# Altium PCB PCB1.PcbDoc
Units mil, origin at the board's own origin, x right, y up, seen from the top; angles counter-clockwise.
Board outline 4500 x 2600 mil, 2 copper layers (Top Layer, Bottom Layer), stack 60.4 mil thick; 8 components, 17 nets, 77 pads, 3 vias.
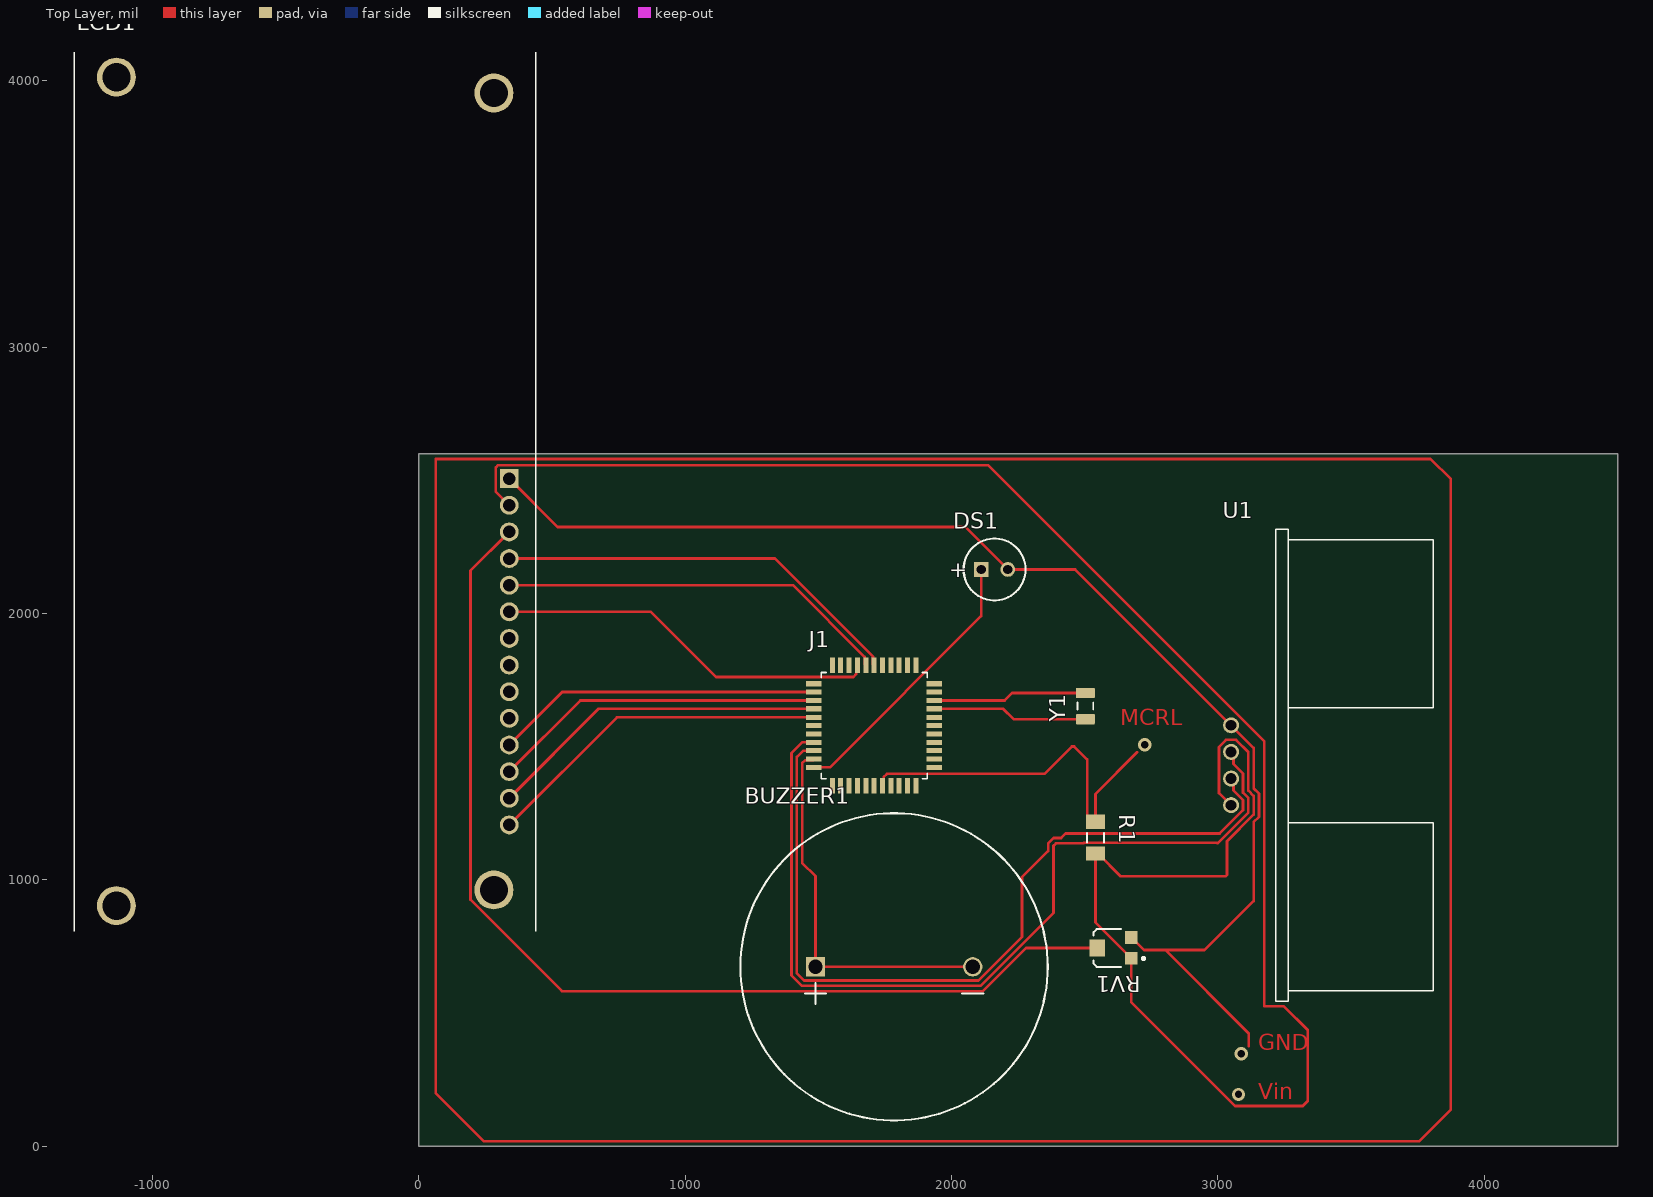
[diagram p0: Top Layer view]
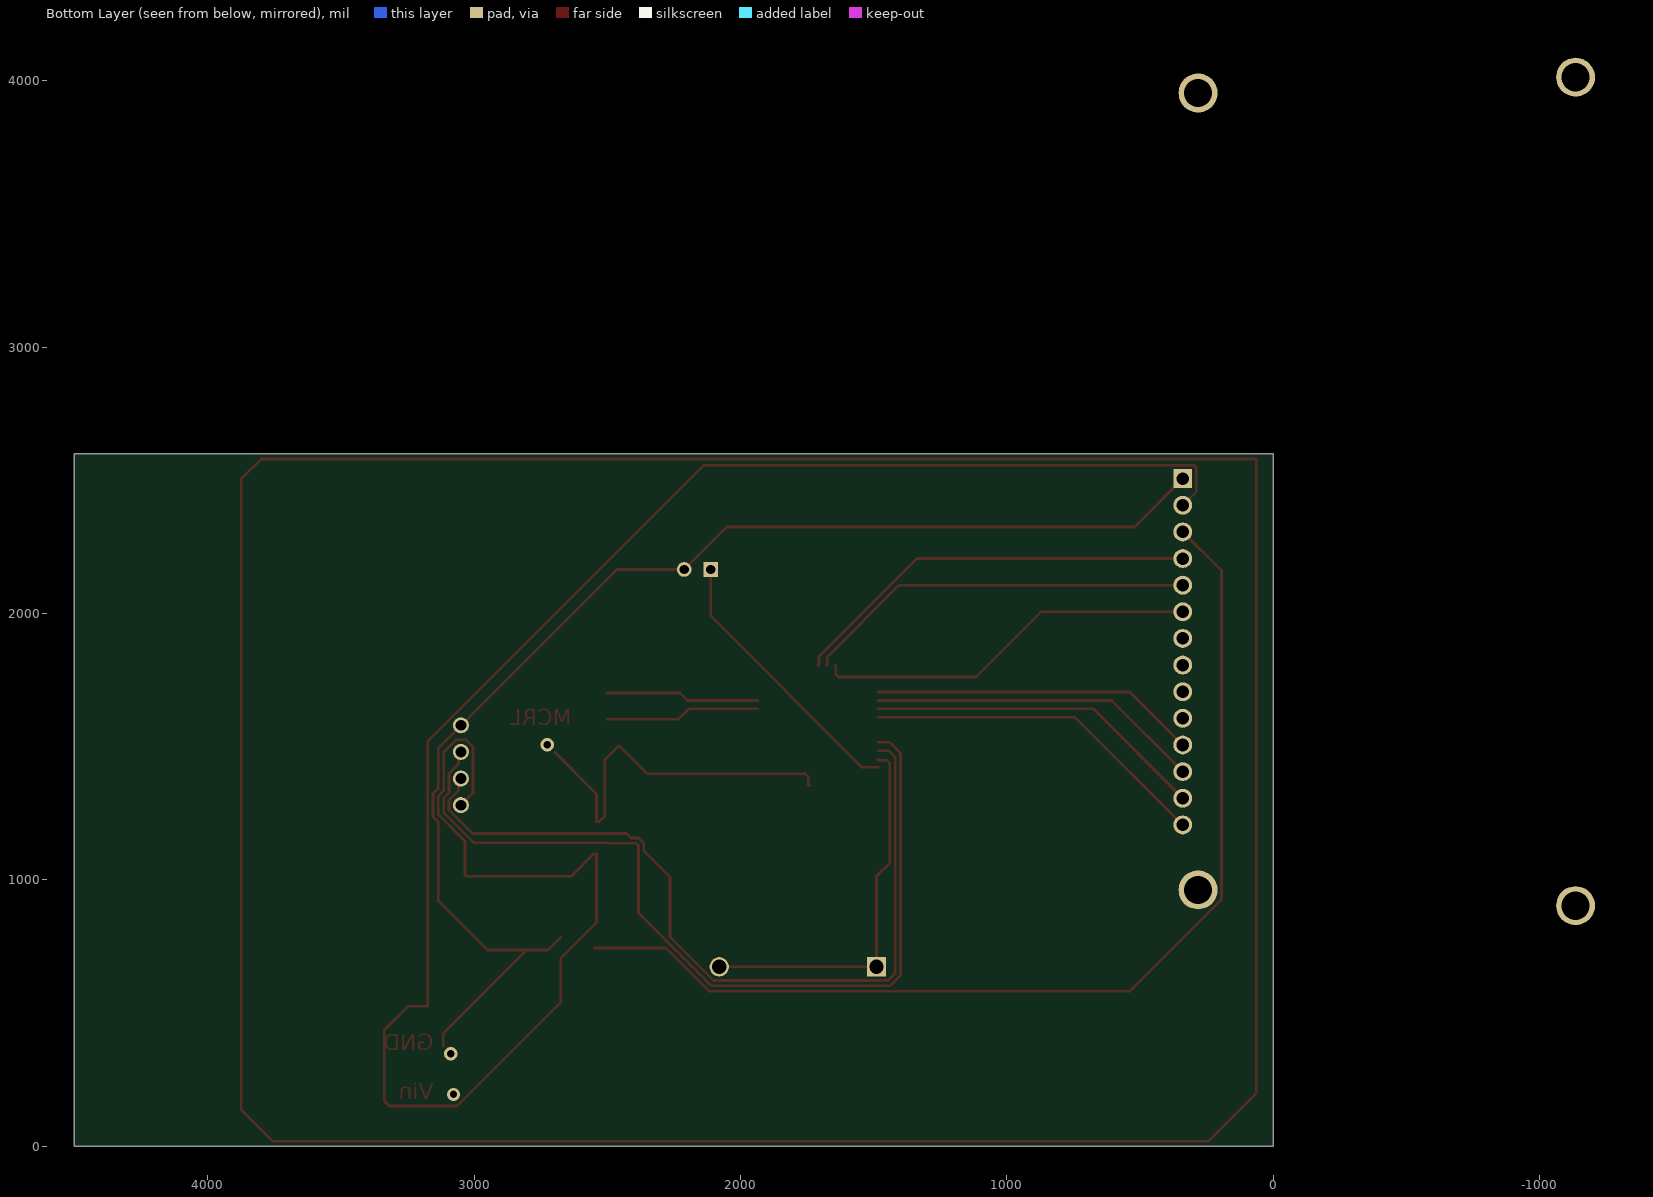
[diagram p1: Bottom Layer view, seen from below]

## Layer stack, top to bottom
Top Solder: solder mask 0.5, Solder Resist, Dk 3.3
Top Layer: signal copper 0.7
Dielectric1: core 59, FR-4, Dk 4.3
Bottom Layer: signal copper 0.7
Bottom Solder: solder mask 0.5, Solder Resist, Dk 3.3

## Board outline
0,0 4500,0 4500,2600 0,2600

## Design rules (kind name [scope] priority, off if disabled: settings)
Clearance [All] p1: gap=10 ignorepadtopadclearanceinfootprint=FALSE
DiffPairsRouting [All] p1: maxlimit=10 minlimit=10 mostfreqgap=10 toplayer_minwidth=10 toplayer_maxwidth=10 toplayer_prefwidth=10 bottomlayer_minwidth=10 bottomlayer_maxwidth=10 bottomlayer_prefwidth=10 maxuncoupledlength=500
HoleSize [All] p1: absolutevalues=TRUE maxlimit=300 minlimit=10 maxpercent=80.000 minpercent=20.000
MinimumAnnularRing [All] p1: minimumring=10
PasteMaskExpansion [All] p1: expansion=10
PlaneClearance [All] p1: clearance=15
PlaneConnect [All] p1: pad.planeconnectstyle=Relief pad.reliefexpansion=20 pad.reliefentries=4 pad.reliefconductorwidth=10 pad.reliefairgap=10 via.planeconnectstyle=Direct via.reliefexpansion=20 via.reliefentries=4 via.reliefconductorwidth=10 via.reliefairgap=10
PolygonConnect [All] p1: thpad.connectstyle=Relief thpad.reliefconductorwidth=10 thpad.reliefentries=4 thpad.polygonreliefangle="90 Angle" thpad.airgapwidth=10 smdpad.connectstyle=Relief smdpad.reliefconductorwidth=10 smdpad.reliefentries=4 smdpad.polygonreliefangle="90 Angle" smdpad.airgapwidth=10 via.connectstyle=Direct via.reliefconductorwidth=10 via.reliefentries=4 via.polygonreliefangle="90 Angle" via.airgapwidth=10
RoomDefinition Sheet1 [InComponentClass('Sheet1')] p1: confinementstyle=ConfineIn formatcopy=TRUE lockcomponents=FALSE outline -7464,-4427 -5464,-4427 -5464,-3427 -7464,-3427
RoutingVias [All] p1: holewidth=10 width=20 viastyle="Through Hole" minholewidth=10 minwidth=20 maxholewidth=10 maxwidth=20
SMDNeckDown [All] p1: percent=100.000
SilkToSolderMaskClearance SilkscreenOverComponentPads [IsPad] p1: minsilkscreentomaskgap=10 clearancetoexposedcopper=TRUE
SolderMaskExpansion [All] p1: expansion=10 istentingtop=FALSE
SupplyNets "Schematic Supply Nets" [InNet('GND')] p1: voltage=0.000
Width [All] p1: maxlimit=10 minlimit=10 preferedwidth=10
24 further rules are at their usual default settings.

## Components (designator, comment, footprint, x,y, rotation, side; value= is the part's Value field where it differs from the comment)
BUZZER1 "ADA1898" ADAI-ADA1898 1784,673.13 r0 top
DS1 "WP7113SGC" KING-WP7113SGC_V 2161,2165 r0 top
J1 "PIC16F877A-E/PT" QFP80P1200X1200X120-44N 1709,1579 r0 top
LCD1 "LM016L" LCD_LM016L 339,2506 r90 top
R1 "Resistor 10k +/-1% 1206 250 mW" RESC3216X60X45ML15T20 2540,1158.04 r270 top value=10k
RV1 "TC33X-2-103E" BOUR-TC33X-2_V 2604,744 r180 top
U1 "HC-SR04" XCVR_HC-SR04 3049,1430 r90 top
Y1 "ABS07-166-32.768KHZ-T" EPSON-FC-135_V 2502.06,1652 r90 top

## Footprints (in the part's own frame and the unit in brackets; to place one, negate y for a bottom-side part, rotate by r counter-clockwise, add the part's x,y. Pads: shape width x height; smd on the part's side, far side on the other; paste and mask are expansions set on the pad)
ADAI-ADA1898 [mm] "THD, 2-Leads, Dia 29.3mm, Pitch 15mm"
  rect 1.85x1.85 hole 1.35: 1(-7.5,0)
  round 1.85 hole 1.35: 2(7.5,0)
  silkscreen extent -14.65,-14.65 14.65,14.65, body extent -14.65,-14.65 14.65,14.65, height 11.95
BOUR-TC33X-2_V [mm] "SMD, 3-Leads, Body 3.8x3.6mm"
  rect 1.2x1.2 smd: 1(-1.8,1) 3(-1.8,-1)
  rect 1.5x1.6 smd: 2(1.45,0)
  silkscreen extent -3.08,-1.8 1.8,1.8, body extent -2,-1.8 1.96,1.8, height 1.15
EPSON-FC-135_V [mm] "SMD, 2-Leads, Body 3.2x1.5mm"
  rrect20% 1x1.8 smd: 1(-1.25,0) 2(1.25,0)
  silkscreen extent -0.35,-0.75 0.35,0.75, body extent -1.6,-0.75 1.6,0.75, height 0.9
KING-WP7113SGC_V [mm] "THD, 2-Leads, Dia 5.9mm, Body Length 8.6mm"
  rect 1.4x1.4 hole 0.889: 1(-1.27,0)
  round 1.4 hole 0.889: 2(1.27,0)
  silkscreen extent -2.95,-2.95 2.95,2.95, body extent -2.95,-2.95 2.5,2.95, height 15.5
LCD_LM016L [mm]
  rect 1.8x1.8 / inner round 1.8 / far side rect 1.8x1.8 hole 1.2: 1(0,0)
  round 1.8 hole 1.2: 2(-2.54,0) 3(-5.08,0) 4(-7.62,0) 5(-10.16,0) 6(-12.7,0) 7(-15.24,0) 8(-17.78,0) 9(-20.32,0) 10(-22.86,0) 11(-25.4,0) 12(-27.94,0) 13(-30.48,0) 14(-33.02,0)
  round 3.716 hole 2.7: 15(36.78,1.46) 16(-39.22,1.46) 17(-40.72,37.46) 18(38.28,37.46)
  silkscreen extent -43.18,-2.54 40.64,41.46, body extent -42,-22 42,22, height 9.05
QFP80P1200X1200X120-44N [mil]
  rect 58x19 smd: 1(-226,157) 2(-226,126) 3(-226,94) 4(-226,63) 5(-226,31) 6(-226,0) 7(-226,-31) 8(-226,-63) 9(-226,-94) 10(-226,-126) 11(-226,-157) 23(226,-157) 24(226,-126) 25(226,-94) 26(226,-63) 27(226,-31) 28(226,0) 29(226,31) 30(226,63) 31(226,94) 32(226,126) 33(226,157)
  rect 19x58 smd: 12(-157,-226) 13(-126,-226) 14(-94,-226) 15(-63,-226) 16(-31,-226) 17(0,-226) 18(31,-226) 19(63,-226) 20(94,-226) 21(126,-226) 22(157,-226) 34(157,226) 35(126,226) 36(94,226) 37(63,226) 38(31,226) 39(0,226) 40(-31,226) 41(-63,226) 42(-94,226) 43(-126,226) 44(-157,226)
  silkscreen extent -199,-199 199,199, body extent -236,-236 236,236, height 47
RESC3216X60X45ML15T20 [mm] "Chip Resistor, 2-Leads, Body 3.3x1.75mm, IPC Low Density"
  rect 1.35x1.85 smd: 1(-1.525,0) 2(1.525,0)
  silkscreen extent -0.45,-0.82 0.45,0.82, body extent -1.65,-0.87 1.65,0.87, height 0.6
XCVR_HC-SR04 [mm]
  round 1.53 hole 1.02: 1(-3.81,0) 2(-1.27,0) 3(1.27,0) 4(3.81,0)
  silkscreen extent -22.5,-19.27 22.5,-4.27

## Part data
BUZZER1: library part CMP-00027-00000-1, "Mini Speaker, 8 Ohm, 0.2 Wmax, -10 to 40 degC, 2-Pin THD, RoHS", Manufacturer="Adafruit Industries", Package Description="2-Pin Through Hole Device, Dia 29.3 mm, Pitch 15 mm", Case/Package=ADA1898, Datasheet URL=https://cdn-shop.adafruit.com/datasheets/P1898.pdf, Datasheet Version=Mar-14, Manufacturer URL=https://www.adafruit.com/, Mounting Technology=TH, Package Reference=ADA1898, RoHS Compliant=Unknown
DS1: library part CMP-007-00032-2, "The Super Bright Green Source Color Device, 2.2 V, -40 to 85 degC, 2-Pin THD, RoHS, Tape and Reel", Case/Package=Radial, Colour=Green, Forward Voltage=2.2V, Manufacturer=Kingbright, Package Description="2-Pin Through Hole Device, Dia 5.9 mm, Body Length 8.6 mm", Package Quantity=1000, Datasheet URL=http://www.kingbrightusa.com/images/catalog/SPEC/WP7113SGC.pdf, Datasheet Version="Rev. 9B, 01/2015", Illumination Colour=Green, Lens Style=Clear, Luminous Intensity=200mcd, Mounting Technology=TH, Nominal Vf=2.2V, Package Reference=WP7113SGC, Packaging=Bulk, RoHS Compliant=True, Viewing Angle=20degrees
J1: "7 KB Flash, 368 RAM, 33 I/O44 TQFP 10x10x1mm TRAY", Package="TQFP-44 Microchip", Check_prices=https://www.snapeda.com/parts/PIC16F877A-E/PT/Microchip/view-part/?ref=eda, MF=Microchip, MP=PIC16F877A-E/PT, SnapEDA_Link=https://www.snapeda.com/parts/PIC16F877A-E/PT/Microchip/view-part/?ref=snap
LCD1: "Display Lcd 35x75mm", Package=None, Availability="Not in stock", Check_prices=https://www.snapeda.com/parts/LM016L/Hitachi/view-part/?ref=eda, MF=Hitachi, MP=LM016L, Price=None, SnapEDA_Link=https://www.snapeda.com/parts/LM016L/Hitachi/view-part/?ref=snap
R1: library part CMP-009-00016-5, "Chip Resistor, 10 KOhm, +/- 1%, 0.25 W, -55 to 155 degC, 1206 (3216 Metric)", Case/Package=1206, Max Operating Temperature=155°C, Min Operating Temperature=-55°C, Power=250mW, Tolerance=1%, Voltage Rating=200V, Mounting Technology=SM, Pins=2, RoHS Compliant=True
RV1: library part CMP-009-00060-2, "Trimming Potentiometer, 1000 Ohm, -40 to 100 degC, 3-Pin SMD, RoHS, Tape and Reel", Case/Package=TC33X-2, Manufacturer=Bourns, Max Operating Temperature=120°C, Min Operating Temperature=-40°C, Package Description="3-Pin Surface Mount Device, Body 3.8 x 3.6 mm", Package Quantity=2500, Power=100mW, Resistance=10k, Tolerance=25%, Composition=Potentiometer, Datasheet URL=http://www.bourns.com/docs/Product-Datasheets/TC33.pdf, Datasheet Version=Aug-16, Manufacturer URL=http://www.bourns.com/, Mounting Technology=SM, Package Reference=TC33X-2, Packaging=TapeandReel, RoHS Compliant=True
U1: "Ultrasonic Sensor Module", Package=None, Availability=Unavailable, MP=HC-SR04, Price=None
Y1: library part CMP-003-00029-1, "Crystal 32.768kHz 10ppm 7pF -40C +85C", Frequency=32.768kHz, Pins=2

## Via types
v1: diameter 50, hole 28, Top Layer to Bottom Layer, 3 vias

## Nets (pads, with @x,y where several pads share a name; then routed paths per layer and width w, separated by ;. In a path a pad name is that pad's centre, name@x,y a point inside that pad or via, vN(x,y) a via of type N, cw(c..) or ccw(c..) an arc to the next point about the centre after c; other vN are vias at no path point)
GND: DS1.2 LCD1.1 RV1.3 U1.4 | length 4850.2
  Top Layer w10: LCD1.1 520.4,2324.6 2051.4,2324.6 DS1.2 2464,2165 U1.4 3134.12,1494.88 3134.12,1343.54 3154.12,1323.54 3154.12,1236.46 3134.12,1216.46 3134.12,920.55 2949.57,736 2803,736 ; RV1.3 2722.24,736 2803,736 ; 3115.28,375.28 3115.28,423.72 2803,736
NetBUZZER1_1: BUZZER1.1 BUZZER1.2 J1.10 | length 1426.1
  Top Layer w10: J1.10 1478.5,1448.5 1449.79,1448.5 1439,1437.71 1439,1063.28 1488.72,1013.56 BUZZER1.1 BUZZER1.2
NetDS1_1: DS1.1 J1.11 | length 1038.1
  Top Layer w10: J1.11 1542.71,1422 2111,1990.29 DS1.1
NetJ1_2: J1.2 LCD1.11 | length 1226.4
  Top Layer w10: LCD1.11 538,1705 J1.2
NetJ1_3: J1.3 LCD1.12 | length 1254.6
  Top Layer w10: LCD1.12 606,1673 J1.3
NetJ1_4: J1.4 LCD1.13 | length 1283.2
  Top Layer w10: LCD1.13 675,1642 J1.4
NetJ1_5: J1.5 LCD1.14 | length 1311.3
  Top Layer w10: LCD1.14 743,1610 J1.5
NetJ1_8: J1.8 U1.3 | length 3341.3
  Top Layer w10: J1.8 1439,1516 1399,1476 1399,640.53 1437.81,601.72 2108.86,601.72 2382.58,875.44 2382.58,1127.75 2391.37,1136.54 2494.33,1136.54 2497.37,1139.57 2994.59,1139.57 2997.63,1136.54 3114.12,1253.03 3114.12,1306.97 3094.12,1326.97 3094.12,1398.69 3057.92,1434.88 3057.92,1471.08 U1.3
NetJ1_9: J1.9 U1.2 | length 3122.5
  Top Layer w10: J1.9 1443.16,1485 1419,1460.84 1419,648.81 1446.09,621.72 2100.57,621.72 2264.44,785.58 2264.44,1009.6 2362.58,1107.75 2362.58,1136.03 2383.09,1156.54 2411.37,1156.54 2428.3,1173.46 3006.27,1173.46 3094.12,1261.31 3094.12,1298.69 3057.92,1334.88 3057.92,1371.08 U1.2
NetJ1_18: J1.18 R1.1 | length 1444.1
  Top Layer w10: J1.18 1744.5,1357.5 1744.5,1385.21 1756.79,1397.5 2348.43,1397.5 2451.44,1500.52 2459.73,1500.52 2508.58,1451.66 2508.58,1239.65 2530.16,1218.08 R1.1 2540,1321.94 2696.78,1478.72
NetJ1_30: J1.30 Y1.1 | length 583.3
  Top Layer w10: J1.30 2193.45,1642 2232.67,1602.79 Y1.1
NetJ1_31: J1.31 Y1.2 | length 578.7
  Top Layer w10: J1.31 2198.95,1673 2227.17,1701.21 Y1.2
NetJ1_39: J1.39 LCD1.4 | length 1552.9
  Top Layer w10: LCD1.4 1336.71,2206 1704.5,1838.21 1704.5,1809.5 J1.39
NetJ1_40: J1.40 LCD1.5 | length 1479.9
  Top Layer w10: LCD1.5 1404.71,2106 1673.5,1837.21 1673.5,1809.5 J1.40
NetJ1_41: J1.41 LCD1.6 | length 1443.5
  Top Layer w10: LCD1.6 870.59,2006 1115.59,1761 1630.71,1761 1641.5,1771.79 1641.5,1800.5 J1.41
NetLCD1_2: LCD1.2 R1.2 RV1.1 U1.1 | length 7805.3
  Top Layer w10: LCD1.2 288.57,2456.43 288.57,2547.65 297.35,2556.43 2136.37,2556.43 3174.12,1518.69 3174.12,524.88 3247.26,524.88 3336.95,435.19 3336.95,169.5 3318.16,150.72 3063.72,150.72 2674.87,539.57 RV1.1 2540,839.5 R1.2 2549.84,1098 2634.84,1013 3028.14,1013 3034,1018.86 3034,1144.62 3134.12,1244.74 3134.12,1315.26 3114.12,1335.26 3114.12,1478.69 3067.69,1525.12 3030.31,1525.12 3003.88,1498.69 3003.88,1325.12 U1.1
NetLCD1_3: LCD1.3 RV1.2 | length 4004
  Top Layer w10: LCD1.3 193.37,2160.37 193.37,925.39 537.05,581.72 2117.14,581.72 2279.42,744 RV1.2
pads on no net: J1.1 J1.6 J1.7 J1.12 J1.13 J1.14 J1.15 J1.16 J1.17 J1.19 J1.20 J1.21 J1.22 J1.23 J1.24 J1.25 J1.26 J1.27 J1.28 J1.29 J1.32 J1.33 J1.34 J1.35 J1.36 J1.37 J1.38 J1.42 J1.43 J1.44 LCD1.7 LCD1.8 LCD1.9 LCD1.10 LCD1.15 LCD1.16 LCD1.17 LCD1.18
copper on no net: | length 12525.7
  Top Layer w10: 63,199 63,2580 3798,2580 3874,2504 3874,137 3755,18 244,18 63,199
  other v1: 3077,194 3087,347 2725.06,1507

## Other copper
Top Layer:
  text "MCRL" at 2633.68,1580 h60
  text "GND" at 3152,359 h60
  text "Vin" at 3152,175.72 h60

## Text inside footprints (layer, text, board x,y; h text height)
DS1: Top Overlay "+" at 1991,2135 h59.06